# Altium PCB IV-18_CLOCK.PcbDoc
Units mm, origin at the board's own origin, x right, y up, seen from the top; angles counter-clockwise.
Board outline 16.51 x 37.46 mm, 2 copper layers (Top Layer, Bottom Layer); 5 components, 24 nets, 61 pads, 3 vias.
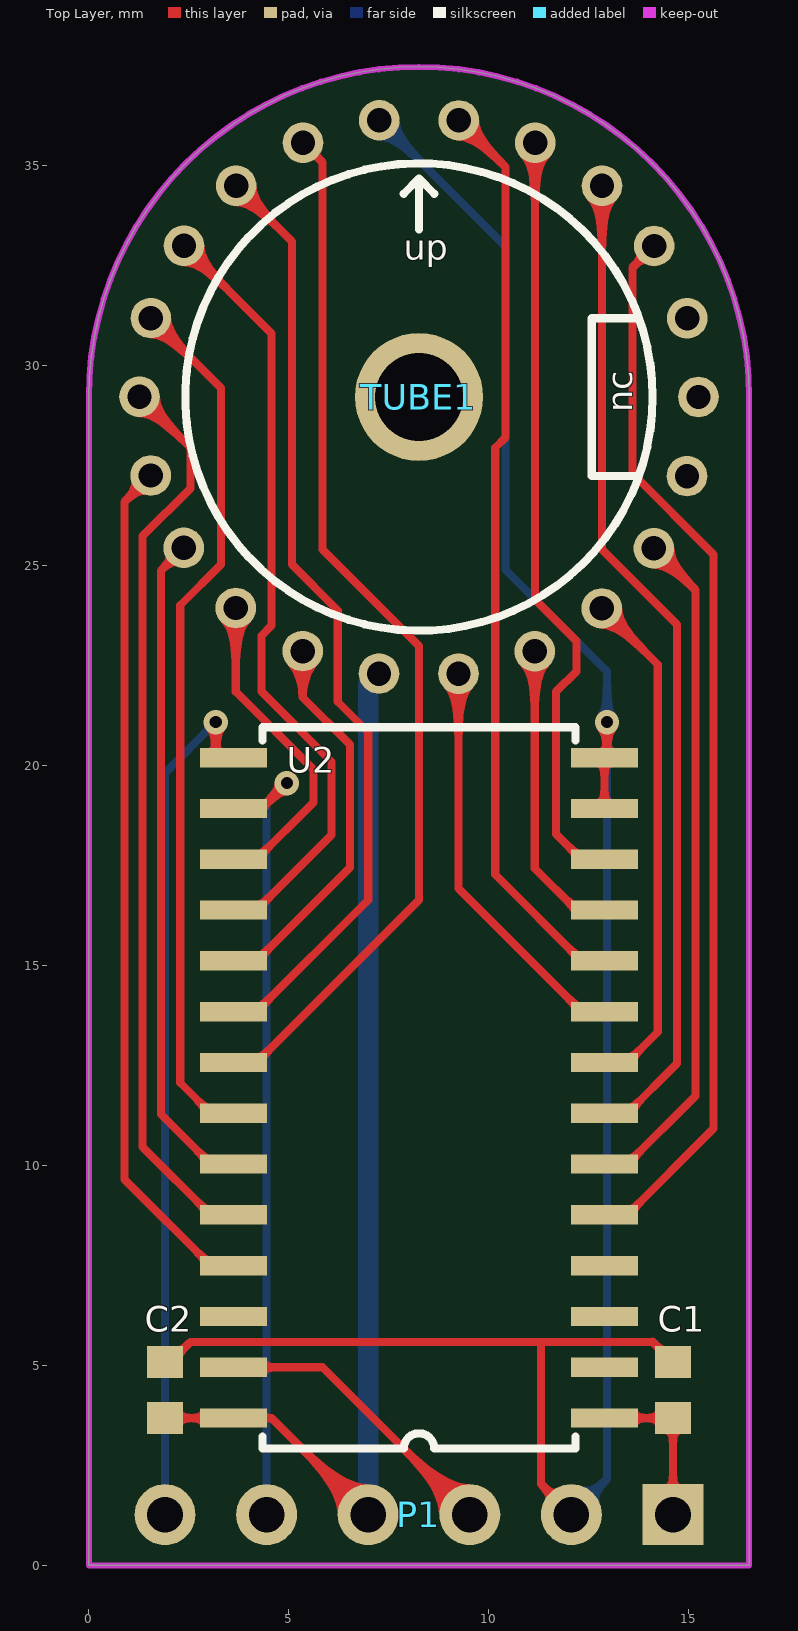
[diagram p0: Top Layer view]
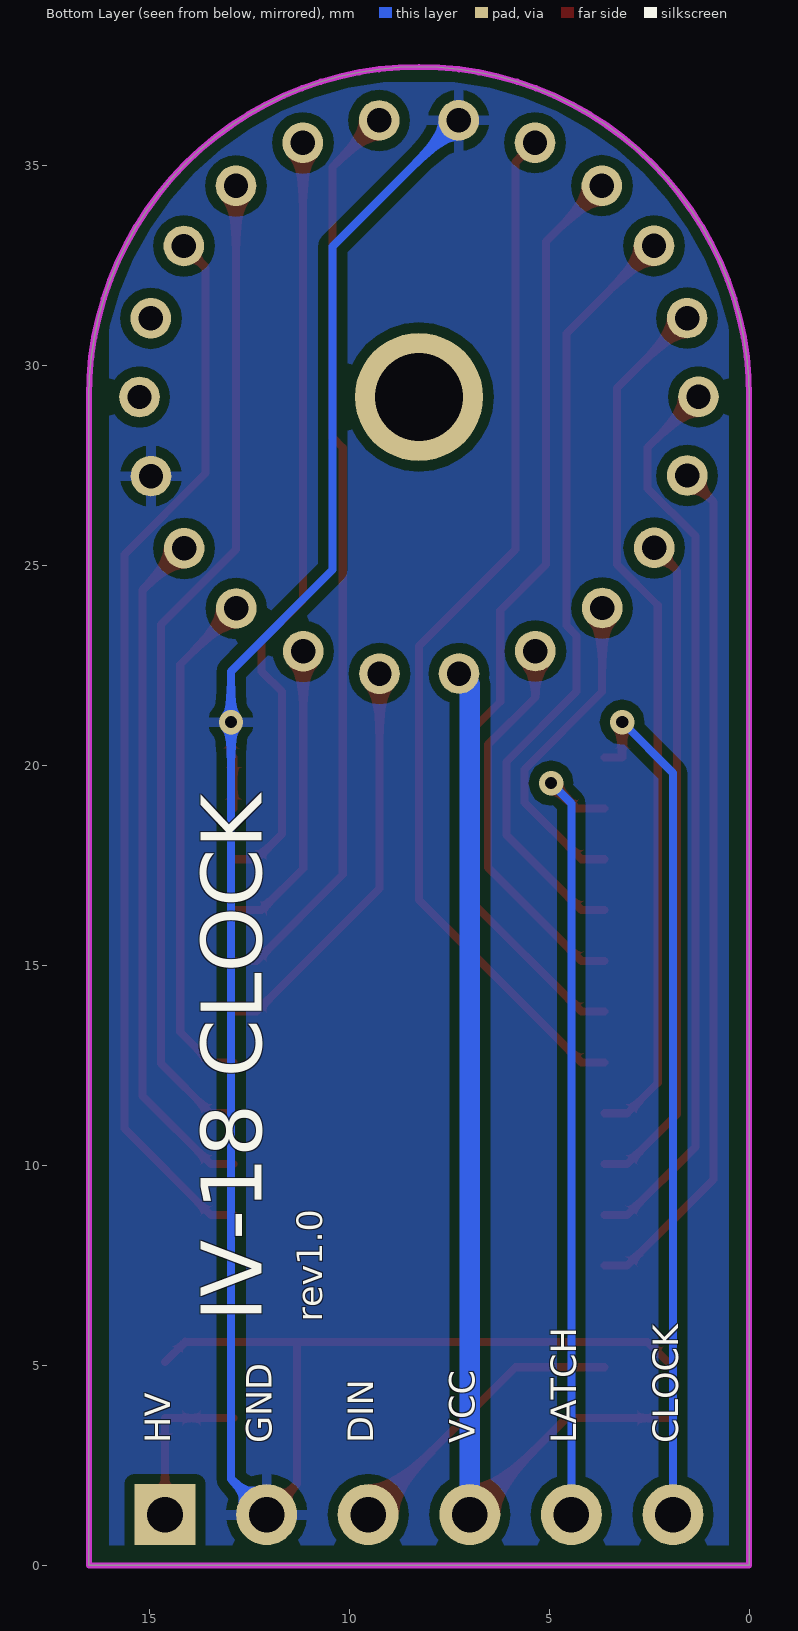
[diagram p1: Bottom Layer view, seen from below]

## Layer stack, top to bottom
Top Solder: solder mask 0.0102, Solder Resist, Dk 3.5
Top Layer: signal copper 0.0356
Dielectric 1: dielectric 0.32, FR-4, Dk 4.8
Bottom Layer: signal copper 0.0356
Bottom Solder: solder mask 0.0102, Solder Resist, Dk 3.5

## Board outline
0,0 0,29.21 cw(c8.255,29.21) 16.51,29.21 16.51,0

## Design rules (kind name [scope] priority, off if disabled: settings)
Clearance [All] p1: gap=0.254 ignorepadtopadclearanceinfootprint=FALSE except(0: Arc-Hole Track-Hole SMDPad-Hole THPad-Hole Via-Hole Fill-Hole Poly-Hole Region-Hole Text-Hole)
PolygonConnect [All] p1: connectstyle=Relief reliefconductorwidth=0.254 reliefentries=4 polygonreliefangle="90 Angle" airgapwidth=0.254
RoutingVias [All] p1: holewidth=0.305 width=0.508 viastyle="Through Hole" minholewidth=0.305 minwidth=0.508 maxholewidth=0.711 maxwidth=1.27
SolderMaskExpansion [All] p1: expansion=0.102
Width [All] p1: maxlimit=0.508 minlimit=0.203 preferedwidth=0.203
30 further rules are at their usual default settings.

## Components (designator, comment, footprint, x,y, rotation, side; value= is the part's Value field where it differs from the comment)
C1 "104" 0603 14.605,4.383 r90 top value=100pF
C2 "104" 0603 1.905,4.383 r270 top value=100pF
P1 "Header 6" CONNECTER_2.54_1X6 14.605,1.27 r180 top
TUBE1 "IV-18" TUBE_IV-18 8.255,29.21 r0 top
U2 "HV5812" SOW28 8.255,11.938 r180 top

## Footprints (in the part's own frame and the unit in brackets; to place one, negate y for a bottom-side part, rotate by r counter-clockwise, add the part's x,y. Pads: shape width x height; smd on the part's side, far side on the other; paste and mask are expansions set on the pad)
0603 [mm] "Chip Capacitor, Body 1.6x0.8mm"
  rect 0.8x0.9 smd: 1(-0.7,0) 2(0.7,0)
  body extent -0.87,-0.48 0.87,0.48, height 1
CONNECTER_2.54_1X6 [mil] "Connector; Header; 6 Position"
  rect 60x60 hole 35: 1(0,0)
  round 60 hole 35: 2(100,0) 3(200,0) 4(300,0) 5(400,0) 6(500,0)
SOW28 [mil]
  rect 66x19 smd: 1(-182.5,325) 2(-182.5,275) 3(-182.5,225) 4(-182.5,175) 5(-182.5,125) 6(-182.5,75) 7(-182.5,25) 8(-182.5,-25) 9(-182.5,-75) 10(-182.5,-125) 11(-182.5,-175) 12(-182.5,-225) 13(-182.5,-275) 14(-182.5,-325) 15(182.5,-325) 16(182.5,-275) 17(182.5,-225) 18(182.5,-175) 19(182.5,-125) 20(182.5,-75) 21(182.5,-25) 22(182.5,25) 23(182.5,75) 24(182.5,125) 25(182.5,175) 26(182.5,225) 27(182.5,275) 28(182.5,325)
  silkscreen extent -154,-355 154,355, body extent -203,-352 203,352, height 98
TUBE_IV-18 [mil] "VFD_IV18"
  round 40 hole 24: 1(-39.42,-272.21) 2(38.85,-272.29) 3(113.97,-250.32) 4(179.87,-208.08) 5(231.19,-148.99) 6(263.8,-77.84) 7(275.05,0) 8(263.91,77.47) 9(231.4,148.67) 10(180.16,207.83) 11(114.32,250.16) 12(39.23,272.23) 13(-39.04,272.26) 14(-114.15,250.24) 15(-180.01,207.96) 16(-231.3,148.83) 17(-263.86,77.66) 18(-275.05,0.19) 19(-263.96,-77.29) 20(-231.51,-148.51) 21(-180.3,-207.71) 22(-114.5,-250.08)
  silkscreen extent -230,-230 230,230

## Part data
C1 C2: library part Cap, "Capacitor", LatestRevisionDate=17-Jul-2002, LatestRevisionNote="Re-released for DXP Platform.", PackageDescription="Radial Cap, Thru-Hole; 2 Leads; 0.3 in Pin Spacing", PackageReference=RAD-0.3, Published=8-Jun-2000, Publisher="Altium Limited"
P1: "Header, 6-Pin", LatestRevisionDate=17-Jul-2002, LatestRevisionNote="Re-released for DXP Platform.", Publisher="Altium Limited"
TUBE1: library part TUBE_IV-18

## Free pads (board coordinates)
  round 3.2 hole 2.2: 3(8.255,29.21)

## Via types
v1: diameter 0.61, hole 0.305, Top Layer to Bottom Layer, 3 vias

## Nets (pads, with @x,y where several pads share a name; then routed paths per layer and width w, separated by ;. In a path a pad name is that pad's centre, name@x,y a point inside that pad or via, vN(x,y) a via of type N, cw(c..) or ccw(c..) an arc to the next point about the centre after c; other vN are vias at no path point)
a: TUBE1.12 U2.10 | length 23.1
  Top Layer w0.203: TUBE1.12 10.414,34.962 10.414,28.194 10.16,27.94 10.16,17.272 12.319,15.113 U2.10
b: TUBE1.10 U2.7 | length 25
  Top Layer w0.203: TUBE1.10 12.831,25.396 14.707,23.52 14.707,12.548 13.462,11.303 U2.7
c: TUBE1.4 U2.8 | length 12.8
  Top Layer w0.203: TUBE1.4 14.224,22.524 14.224,13.335 13.462,12.573 U2.8
CLOCK: P1.6 U2.15 | length 21.7
  Top Layer w0.203: v1(3.175,21.082) 3.175,20.193 U2.15
  Bottom Layer w0.203: P1.6 1.905,19.812 v1(3.175,21.082)
d: TUBE1.3 U2.11 | length 7.6
  Top Layer w0.203: TUBE1.3 11.15,17.425 12.192,16.383 U2.11
D1: TUBE1.15 U2.20 | length 23.7
  Top Layer w0.203: U2.20 4.191,13.843 6.985,16.637 6.985,20.828 6.223,21.59 6.223,23.876 5.08,25.019 5.08,33.095 TUBE1.15
D2: TUBE1.22 U2.19 | length 9.8
  Top Layer w0.203: U2.19 4.191,15.113 6.528,17.45 6.528,20.523 5.347,21.704 TUBE1.22
D3: TUBE1.16 U2.18 | length 19.7
  Top Layer w0.203: TUBE1.16 4.572,30.798 4.572,23.495 4.318,23.241 4.318,21.844 6.071,20.091 6.071,18.263 4.191,16.383 U2.18
D4: TUBE1.21 U2.17 | length 8.2
  Top Layer w0.203: U2.17 4.191,17.653 5.613,19.075 5.613,19.902 3.675,21.84 TUBE1.21
D5: TUBE1.17 U2.22 | length 21.9
  Top Layer w0.203: TUBE1.17 3.302,29.434 3.302,25.019 2.286,24.003 2.286,12.065 3.048,11.303 U2.22
D6: TUBE1.20 U2.23 | length 16.7
  Top Layer w0.203: TUBE1.20 1.803,24.866 1.803,11.278 3.048,10.033 U2.23
D7: TUBE1.19 U2.25 | length 21.5
  Top Layer w0.203: TUBE1.19 0.889,26.586 0.889,9.652 3.048,7.493 U2.25
D8: TUBE1.18 U2.24 | length 22.7
  Top Layer w0.203: TUBE1.18 2.54,27.944 2.54,26.924 1.346,25.73 1.346,10.465 3.048,8.763 U2.24
D9: TUBE1.14 U2.21 | length 26.4
  Top Layer w0.203: U2.21 4.191,12.573 8.255,16.637 8.255,22.987 5.842,25.4 5.842,35.08 TUBE1.14
DIN: P1.3 U2.27 | length 7.4
  Top Layer w0.203: U2.27 5.842,4.953 P1.3
DOUT: U2.2
e: TUBE1.5 U2.6 | length 17.1
  Top Layer w0.203: U2.6 13.462,10.033 15.164,11.735 15.164,24.389 TUBE1.5
f: TUBE1.11 U2.12 | length 19.4
  Top Layer w0.203: TUBE1.11 11.159,24.147 12.192,23.114 12.192,22.352 11.684,21.844 11.684,18.288 12.319,17.653 U2.12
g: TUBE1.9 U2.5 | length 26.8
  Top Layer w0.203: U2.5 13.462,8.763 15.621,10.922 15.621,25.273 13.589,27.305 13.589,32.443 TUBE1.9
GND: C1.2 C2.1 P1.2 TUBE1.6 TUBE1.13 U2.13 U2.14 | length 57.5
  Top Layer w0.203: C2.1 2.035,5.083 2.54,5.588 11.303,5.588 ; P1.2 11.303,2.032 11.303,5.588 ; U2.13 U2.14 12.954,20.256 v1(12.954,21.082) ; 14.1,5.591 14.1,5.588 ; C1.2 14.1,5.588 ; 11.303,5.588 14.1,5.588
  Bottom Layer w0.203: TUBE1.13 10.414,32.975 10.414,24.892 12.954,22.352 v1(12.954,21.082) 12.954,2.159 P1.2
HV: C1.1 P1.1 U2.1 | length 4.1
  Top Layer w0.203: U2.1 C1.1 P1.1
LATCH: P1.5 U2.16 | length 20.1
  Top Layer w0.203: U2.16 4.318,18.923 v1(4.953,19.558)
  Bottom Layer w0.203: P1.5 4.445,19.05 v1(4.953,19.558)
Point: TUBE1.2 U2.9 | length 10.3
  Top Layer w0.203: TUBE1.2 9.242,16.92 12.319,13.843 U2.9
VCC: C2.2 P1.4 TUBE1.1 U2.28 | length 27.2
  Top Layer w0.203: C2.2 U2.28 4.572,3.683 P1.4
  Bottom Layer w0.508: P1.4 6.985,22.027 TUBE1.1
pads on no net: TUBE1.7 TUBE1.8 U2.3 U2.4 U2.26

## Polygon pours and split planes (outlines as drawn)
GND on Bottom Layer "BottomLayer-GND" (solid, remove dead copper, pour order 0): 0.508,0.508 16.002,0.508 16.002,37.084 0.508,37.084

## Keep-outs
Keep-Out Layer:
  the board outline again, w0.152

## Other copper
Bottom Layer:
  pour cut-out: 0.508,37.084 0.508,33.02 0.762,33.02 1.778,34.036 1.778,34.544 3.048,35.814 3.302,35.814 3.81,36.322 4.318,36.322 4.826,36.83 4.826,37.084
  pour cut-out: 11.681,37.087 11.681,36.833 11.935,36.833 12.189,36.579 13.205,36.071 14.986,34.29 15.745,33.277 15.858,33.203 15.999,33.203 15.999,36.833 15.999,37.087 11.974,37.087

## Silkscreen, mask and mechanical layers (free items; w line width, h text height)
Bottom Overlay:
  text "rev1.0" at 10.668,6.096 h0.64 r270
  text "IV-18 CLOCK" at 12.192,6.096 h1.52 r270
  text "CLOCK" at 1.778,3.048 h0.64 r270
  text "LATCH" at 4.318,3.048 h0.64 r270
  text "VCC" at 6.858,3.048 h0.64 r270
  text "DIN" at 9.398,3.048 h0.64 r270
  text "GND" at 11.938,3.048 h0.64 r270
  text "HV" at 14.478,3.048 h0.64 r270

## Text inside footprints (layer, text, board x,y; h text height)
TUBE1: Top Overlay "nc" at 13.589,28.829 h0.64 r90; Top Overlay "up" at 7.874,32.639 h0.64